# Altium PCB Cougar Power_Altium.PcbDoc
Units mil, origin at the board's own origin, x right, y up, seen from the top; angles counter-clockwise.
Board outline 8110 x 6100 mil, 2 copper layers (Top Layer, Bottom Layer); 48 components, 13 nets, 126 pads, 15 vias.
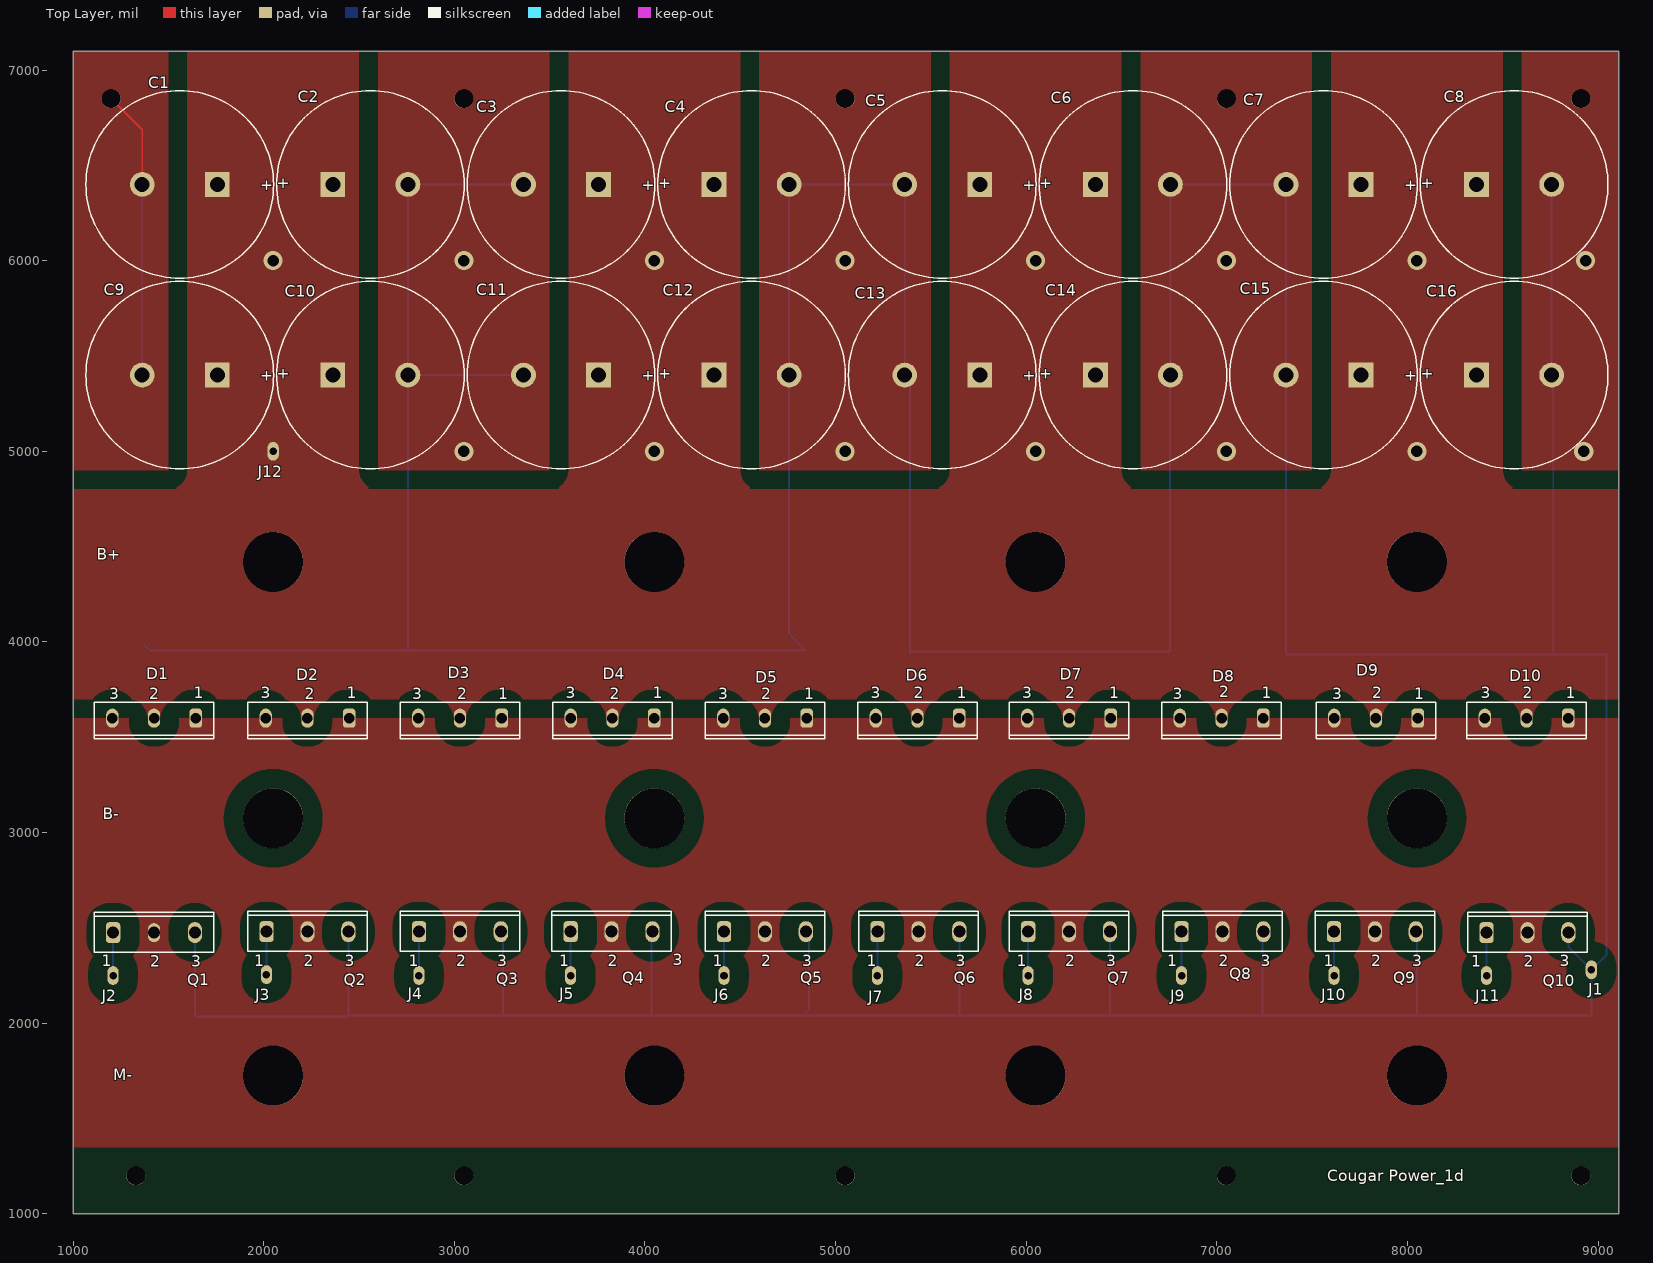
[diagram p0: Top Layer view]
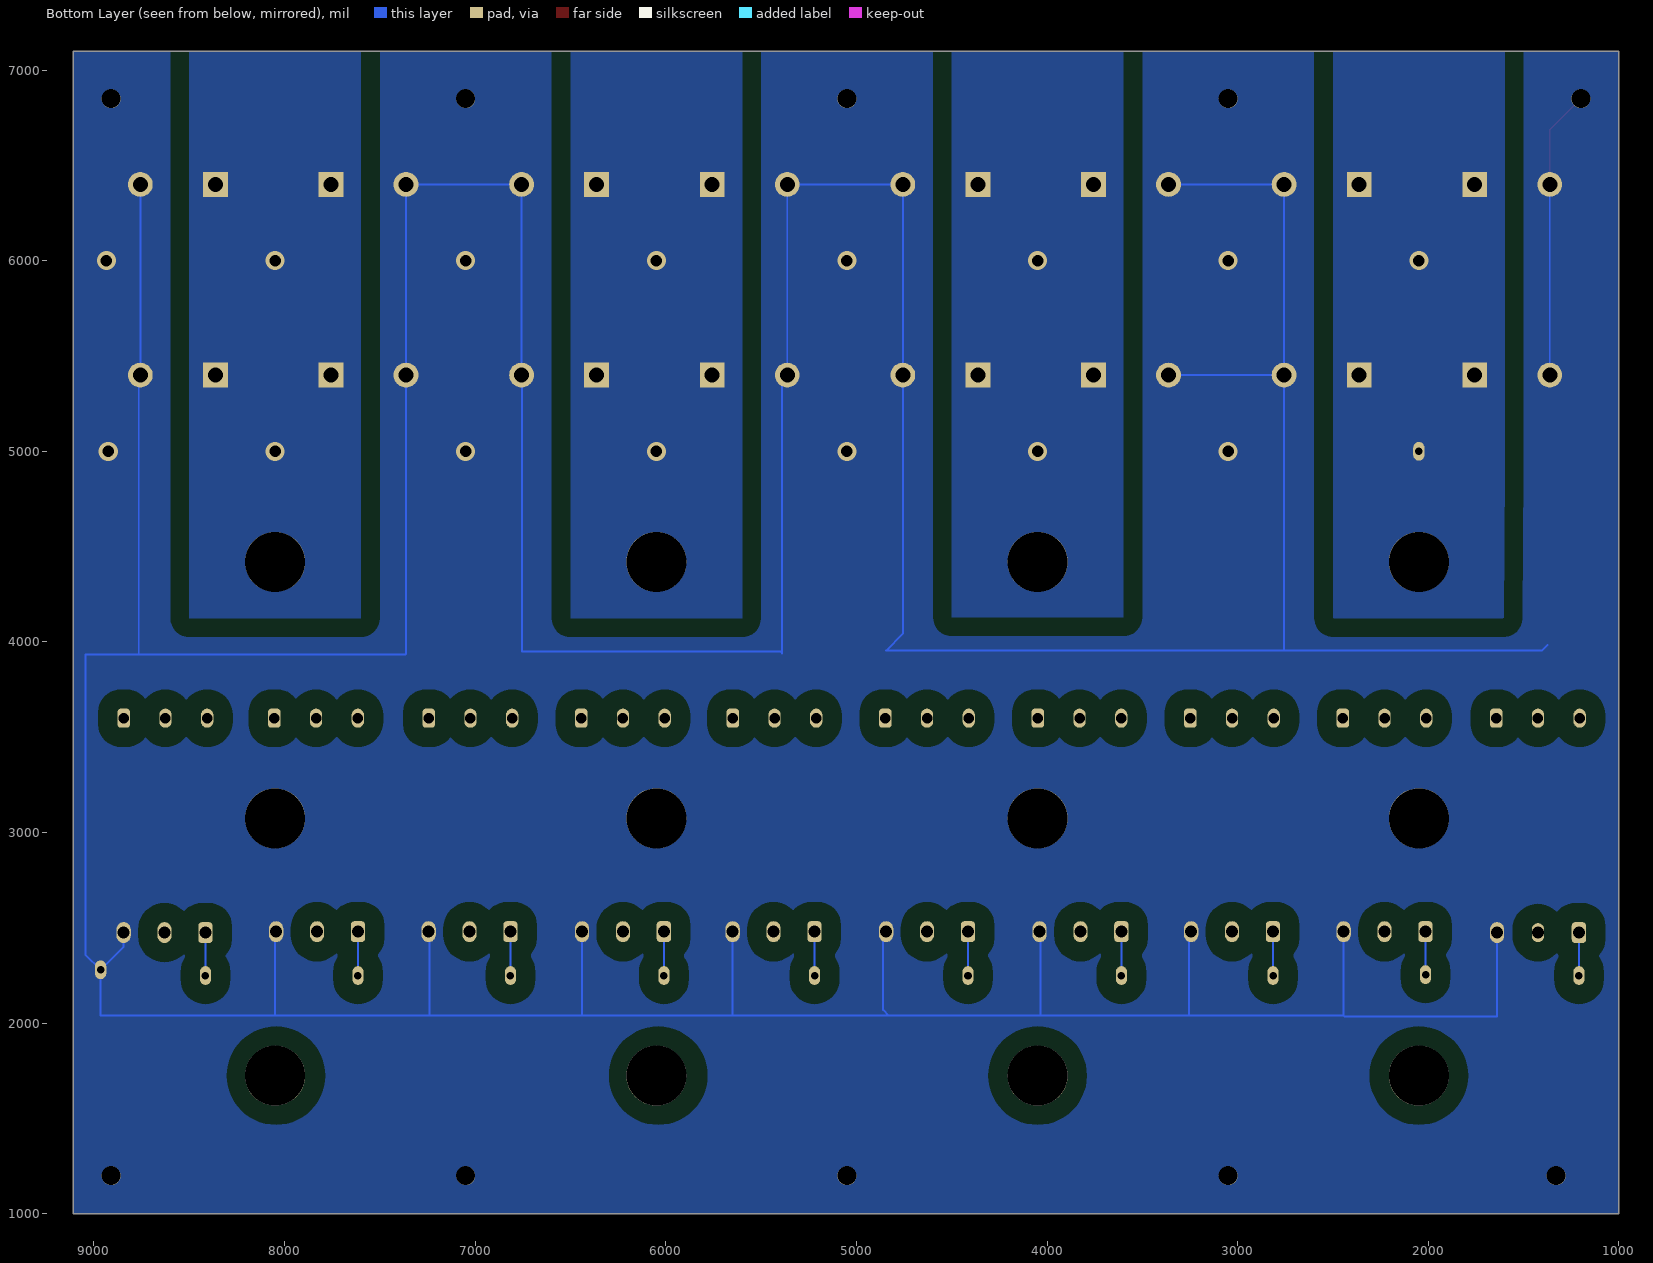
[diagram p1: Bottom Layer view, seen from below]

## Layer stack, top to bottom
Top Layer: signal copper 1.4
Dielectric: core 12.6, FR-4, Dk 4.8
Bottom Layer: signal copper 1.4

## Board outline
1000,1000 9110,1000 9110,7100 1000,7100

## Design rules (kind name [scope] priority, off if disabled: settings)
Clearance GND [InNet('GND')] p1: gap=95
Clearance [All] p2: gap=95
ComponentClearance [All] p1: gap=10 collisioncheckmode=3 verticalgap=10
Height [All] p1: minheight=0 maxheight=1655 prefheight=500
HoleSize [All] p1: absolutevalues=TRUE maxlimit=325 minlimit=1 maxpercent=80.000 minpercent=20.000
PolygonConnect [All] p1: connectstyle=Direct reliefconductorwidth=10 reliefentries=4 polygonreliefangle="90 Angle"
RoomDefinition "Cougar Power_1d" [InComponentClass('Cougar Power_1d')] p1: confinementstyle=ConfineIn formatcopy=TRUE lockcomponents=FALSE outline 9110,7100 1000,7100 1000,1000 9110,1000
RoutingVias [All] p1: holewidth=28 width=50 viastyle="Through Hole" minholewidth=28 minwidth=50 maxholewidth=28 maxwidth=50
SolderMaskExpansion [All] p1: expansion=4
TestPointUsage [All] p1: valid=0 allowmultiple=FALSE
Testpoint [All] p1: side=15 testpointundercomponent=TRUE minsize=40 maxsize=100 preferedsize=60 minholesize=0 maxholesize=40 preferedholesize=32 testpointgrid=1 style=1023 order=0123456789
Width [All] p1: maxlimit=10 minlimit=10 preferedwidth=10
16 further rules are at their usual default settings.

## Components (designator, comment, footprint, x,y, rotation, side; value= is the part's Value field where it differs from the comment)
C1 "820uF" CAPPRS10-25x40 1560,6400 r180 top
C2 "820uF" CAPPRS10-25x40 2560,6400 r0 top
C3 "820uF" CAPPRS10-25x40 3560,6400 r180 top
C4 "820uF" CAPPRS10-25x40 4560,6400 r0 top
C5 "820uF" CAPPRS10-25x40 5560,6400 r180 top
C6 "820uF" CAPPRS10-25x40 7560,5400 r180 top
C7 "820uF" CAPPRS10-25x40 6560,5400 r0 top
C8 "820uF" CAPPRS10-25x40 8560,6400 r0 top
C9 "820uF" CAPPRS10-25x40 6560,6400 r0 top
C10 "820uF" CAPPRS10-25x40 7560,6400 r180 top
C11 "820uF" CAPPRS10-25x40 5560,5400 r180 top
C12 "820uF" CAPPRS10-25x40 1560,5400 r180 top
C13 "820uF" CAPPRS10-25x40 2560,5400 r0 top
C14 "820uF" CAPPRS10-25x40 3560,5400 r180 top
C15 "820uF" CAPPRS10-25x40 4560,5400 r0 top
C16 "820uF" CAPPRS10-25x40 8560,5400 r0 top
D1 "STTH6002C" TO-247 1425,3600 r180 top
D2 "STTH6002C" TO-247 2230,3600 r180 top
D3 "STTH6002C" TO-247 3030,3600 r180 top
D4 "STTH6002C" TO-247 3830,3600 r180 top
D5 "STTH6002C" TO-247 4630,3600 r180 top
D6 "STTH6002C" TO-247 5430,3600 r180 top
D7 "STTH6002C" TO-247 6224.98,3600 r180 top
D8 "STTH6002C" TO-247 7025,3600 r180 top
D9 "STTH6002C" TO-247 7835,3600 r180 top
D10 "STTH6002C" TO-247 8625,3600 r180 top
J1 "SIN-002T-1.0" SIN-002T-1.0 8965,2280 r0 top
J2 "SIN-002T-1.0" SIN-002T-1.0 1210,2250 r0 top
J3 "SIN-002T-1.0" SIN-002T-1.0 2015,2255 r0 top
J4 "SIN-002T-1.0" SIN-002T-1.0 2815,2250 r0 top
J5 "SIN-002T-1.0" SIN-002T-1.0 3610,2250 r0 top
J6 "SIN-002T-1.0" SIN-002T-1.0 4415,2250 r0 top
J7 "SIN-002T-1.0" SIN-002T-1.0 5220,2250 r0 top
J8 "SIN-002T-1.0" SIN-002T-1.0 6010,2250 r0 top
J9 "SIN-002T-1.0" SIN-002T-1.0 6815,2250 r0 top
J10 "SIN-002T-1.0" SIN-002T-1.0 7615,2250 r0 top
J11 "SIN-002T-1.0" SIN-002T-1.0 8415,2250 r0 top
J12 "SIN-002T-1.0" SIN-002T-1.0 2050,5000 r0 top
Q1 "IRFP4668" TO-247AC#1 1425,2475 r0 top
Q2 "IRFP4668" TO-247AC#2 2230,2480 r0 top
Q3 "IRFP4668" TO-247AC#2 3030,2480 r0 top
Q4 "IRFP4668" TO-247AC#2 3825,2480 r0 top
Q5 "IRFP4668" TO-247AC#2 4630,2480 r0 top
Q6 "IRFP4668" TO-247AC#2 5435,2480 r0 top
Q7 "IRFP4668" TO-247AC#2 6225,2480 r0 top
Q8 "IRFP4668" TO-247AC#2 7030,2480 r0 top
Q9 "IRFP4668" TO-247AC#2 7830,2480 r0 top
Q10 "IRFP4668" TO-247AC#2 8630,2475 r0 top

## Footprints (in the part's own frame and the unit in brackets; to place one, negate y for a bottom-side part, rotate by r counter-clockwise, add the part's x,y. Pads: shape width x height; smd on the part's side, far side on the other; paste and mask are expansions set on the pad)
CAPPRS10-25x40 [mm] "Capacitor, Electrolytic, Radial, Snap-In Pins; Body 25 x 40 mm (Dia.xH typ); Pin Spacing 10 mm (typ)"
  rect 3.3x3.3 hole 2: 1(-5,0)
  round 3.3 hole 2: 2(5,0)
  silkscreen extent -12.5,-12.5 12.5,12.5
SIN-002T-1.0 [mm] "CONN TERM CRIMP 26-28AWG TIN"
  oval 1.5x2.5 hole 1: 1(0,0)
TO-247 [mm] "SIP with Mounting Hole; 3 Leads; Body 20.6 x 15.6 x 4.7 mm (typ); Pitch 5.56 mm"
  rrect50% 1.651x2.54 hole 1.4: 1(-5.56,0)
  oval 1.651x2.54 hole 1.4: 2(0,0) 3(5.56,0)
  silkscreen extent -7.95,-2.15 7.95,2.75
TO-247AC#1 [mm] "SIP with Mounting Hole; 3 Leads; Body 20 x 15.6 x 5 mm (typ); Pitch 5.45 mm"
  rrect50% 1.905x2.794 hole 1.6: 1(-5.45,0)
  oval 1.651x2.54 hole 1.6: 2(0,0)
  oval 1.905x2.794 hole 1.6: 3(5.45,0)
  silkscreen extent -7.95,-2.6 7.95,2.7
TO-247AC#2 [mm] "SIP with Mounting Hole; 3 Leads; Body 20 x 15.6 x 5 mm (typ); Pitch 5.45 mm"
  rrect50% 1.905x2.794 hole 1.6: 1(-5.45,0)
  oval 1.905x2.794 hole 1.6: 2(0,0) 3(5.45,0)
  silkscreen extent -7.95,-2.6 7.95,2.7

## Part data
D1 D2 D3 D4 D5 D6 D7 D8 D9 D10: library part STTH2002C
Q1 Q2 Q3 Q4 Q5 Q6 Q7 Q8 Q9 Q10: library part IRFP448

## Free pads (board coordinates)
  round 315 hole 315: 5(2050,1725) 5(2050,3075) 5(2050,4420) 5(4050,1725) 5(4050,3075) 5(4050,4420) 5(6050,1725) 5(6050,3075) 5(6050,4420) 5(8050,1725) 5(8050,3075) 5(8050,4420)
  round 100 hole 100: 11(1200,6850) 11(1330,1200) 11(3050,1200) 11(3050,6850) 11(5050,1200) 11(5050,6850) 11(7050,1200) 11(7050,6850) 11(8910,1200) 11(8910,6850)

## Via types
v1: diameter 100, hole 60, Top Layer to Bottom Layer, 15 vias

## Nets (pads, with @x,y where several pads share a name; then routed paths per layer and width w, separated by ;. In a path a pad name is that pad's centre, name@x,y a point inside that pad or via, vN(x,y) a via of type N, cw(c..) or ccw(c..) an arc to the next point about the centre after c; other vN are vias at no path point)
+VBATT: C1.1 C2.1 C3.1 C4.1 C5.1 C6.1 C7.1 C8.1 C9.1 C10.1 C11.1 C12.1 C13.1 C14.1 C15.1 C16.1 D1.2 D2.2 D3.2 D4.2 D5.2 D6.2 D7.2 D8.2 D9.2 D10.2 J12.1 pad.5@2050,4420 pad.5@4050,4420 pad.5@6050,4420 pad.5@8050,4420
  other v1: 4050,5000 6050,5000 8050,5000 2050,6000 4050,6000 6050,6000 8050,6000
GND: C1.2 C2.2 C3.2 C4.2 C5.2 C6.2 C7.2 C8.2 C9.2 C10.2 C11.2 C12.2 C13.2 C14.2 C15.2 C16.2 J1.1 pad.5@2050,3075 pad.5@4050,3075 pad.5@6050,3075 pad.5@8050,3075 pad.11 Q1.3 Q2.3 Q3.3 Q4.3 Q5.3 Q6.3 Q7.3 Q8.3 Q9.3 Q10.3 | length 38770.8
  Top Layer w10: pad.11@1200,6850 1363.15,6686.85 C1.2
  Bottom Layer w10: C1.2 C12.2 C12.2@1375,5388.15 ; 1375,3985 1405,3955 4845,3955 4756.85,4043.15 C15.2 C4.2 C5.2 C11.2 5390,5373.15 5390,3940 5400,3950 6755,3950 6755,5398.15 C7.2 C9.2 C10.2 C6.2 7363.15,3936.85 7365,3935 9045,3935 9045,2360 J1.1 ; Q1.3 1639.57,2035.43 2440.43,2035.43 2444.57,2039.57 ; Q2.3 2444.57,2039.57 ; C13.2 C14.2 ; 2765,3955 2756.85,3963.15 C2.2 C3.2 ; Q3.3 3255,2469.57 3255,2040 3254.57,2039.57 ; 4034.57,2039.57 4035,2040 4035,2475.43 Q4.3 ; 4829.57,2039.57 4860,2070 4860,2464.57 Q5.3 ; 5649.57,2039.57 Q6.3 ; 6439.57,2039.57 6440,2040 6440,2479.57 Q7.3 ; 7239.57,2039.57 7240,2040 7240,2475.43 Q8.3 ; Q9.3 8050,2474.57 8050,2040 8049.57,2039.57 ; C8.2 C16.2 8765,5391.85 8765,3935 ; Q10.3 8844.57,2400.43 J1.1 ; 2444.57,2039.57 8964.57,2039.57 8965,2040 J1.1
  other v1: 3050,5000 5050,5000 7050,5000 8925,5000 3050,6000 5050,6000 7050,6000 8935,6000
M-: D1.1 D1.3 D2.1 D2.3 D3.1 D3.3 D4.1 D4.3 D5.1 D5.3 D6.1 D6.3 D7.1 D7.3 D8.1 D8.3 D9.1 D9.3 D10.1 D10.3 pad.5@2050,1725 pad.5@4050,1725 pad.5@6050,1725 pad.5@8050,1725 Q1.2 Q2.2 Q3.2 Q4.2 Q5.2 Q6.2 Q7.2 Q8.2 Q9.2 Q10.2
NetJ2_1: J2.1 Q1.1 | length 224.6
  Bottom Layer w10: J2.1@1210.43,2250.43 Q1.1
NetJ3_1: J3.1 Q2.1 | length 224.6
  Bottom Layer w10: J3.1 Q2.1@2015,2479.57
NetJ4_1: J4.1 Q3.1 | length 229.6
  Bottom Layer w10: J4.1@2815.43,2250.43 Q3.1
NetJ5_1: J5.1 Q4.1 | length 229.6
  Bottom Layer w10: J5.1 Q4.1@3610,2479.57
NetJ6_1: J6.1 Q5.1 | length 229.6
  Bottom Layer w10: J6.1@4415.43,2250.43 Q5.1
NetJ7_1: J7.1 Q6.1 | length 229.6
  Bottom Layer w10: J7.1 Q6.1@5220,2479.57
NetJ8_1: J8.1 Q7.1 | length 229.6
  Bottom Layer w10: J8.1@6010.43,2250.43 Q7.1
NetJ9_1: J9.1 Q8.1 | length 229.6
  Bottom Layer w10: J9.1 Q8.1@6815,2479.57
NetJ10_1: J10.1 Q9.1 | length 229.6
  Bottom Layer w10: J10.1@7615.43,2250.43 Q9.1
NetJ11_1: J11.1 Q10.1 | length 224.6
  Bottom Layer w10: J11.1@8415.43,2250.43 Q10.1

## Polygon pours and split planes (outlines as drawn)
M- on Top Layer "Top Layer-M- 1" (solid, pour order 1007): 1227.83,1350 1432.17,1350 1432.17,1410 1225,1410
M- on Top Layer "Top Layer-M-" (solid, pour order 1006): 1000,1350 9110,1350 9110,3600 1000,3600
GND on Top Layer "Top Layer-GND" (solid, pour order 1000): 8555,7100 9110,7100 9110,4850 8545,4850 8545,7100
GND on Top Layer "Top Layer-GND 1" (solid, pour order 1001): 6550,7100 7555,7100 7555,4840 6550,4840
GND on Top Layer "Top Layer-GND 2" (solid, pour order 1002): 4550,7100 5550,7100 5550,4840 4550,4840
GND on Top Layer "Top Layer-GND 3" (solid, pour order 1003): 2550,7100 3550,7100 3550,4865 2550,4865
GND on Top Layer "Top Layer-GND 4" (solid, pour order 1004): 1000,7100 1550,7100 1550,4830 1000,4830
+VBATT on Top Layer "Top Layer-+VBATT" (solid, pour order 1005): 7550,7100 8550,7100 8550,4800 7550,4800
+VBATT on Top Layer "Top Layer-+VBATT 1" (solid, pour order 1006): 6550,7100 6550,4745 5545,4745 5545,7100
+VBATT on Top Layer "Top Layer-+VBATT 2" (solid, pour order 1007): 4550,7100 4550,4800 3550,4800 3550,7100
+VBATT on Top Layer "Top Layer-+VBATT 3" (solid, pour order 1008): 2550,7100 2550,4800 1545,4800 1545,7100
+VBATT on Top Layer "Top Layer-+VBATT 4" (solid, pour order 1009): 1000,4800 9110,4800 9110,3600 1006.33,3600 1006.33,4800
GND on Bottom Layer "Bottom Layer-GND" (solid, pour order 1009): 1000,7100 1000,1000 9115,1000 9115,7100
+VBATT on Bottom Layer "Bottom Layer-+VBATT" (solid, pour order 1010): 1550,7100 2550,7100 2550,4080 1550,4080
+VBATT on Bottom Layer "Bottom Layer-+VBATT 1" (solid, pour order 1011): 3550,7100 4560,7100 4560,4075 3550,4075
+VBATT on Bottom Layer "Bottom Layer-+VBATT 2" (solid, pour order 1012): 5550,7100 6555,7100 6555,4075 5550,4075
+VBATT on Bottom Layer "Bottom Layer-+VBATT 3" (solid, pour order 1013): 7550,7100 8545,7100 8545,4080 7550,4080
GND on Bottom Solder (solid): 1000,2700 9110,2700 9110,3450 1000,3450

## Silkscreen, mask and mechanical layers (free items; w line width, h text height)
Top Overlay:
  text "B+" at 1125,4430 h60
  text "B-" at 1155,3070 h60
  text "M-" at 1210,1700 h60
  text "Cougar Power_1d" at 7580,1170 h60
Top Solder:
  region: 1000,4800 1000,4050 9110,4050 9110,4800
  region: 1000,1350 9110,1350 9110,2100 1000,2100
  lines w80: 1040,2100 1040,2585
  lines w90: 1825,2100 1825,2580 ; 2630,2095 2630,2600 ; 3425,2100 3425,2595 ; 4225,2100 4225,2590 ; 5030,2100 5030,2595 ; 5825,2100 5825,2595 ; 6625,2105 6625,2590 ; 7425,2095 7425,2590 ; 8230,2100 8230,2595
  lines w150: 1425,2300 1425,2595 ; 2230,2300 2230,2600 ; 3030,2295 3030,2590 ; 3825,2300 3825,2600 ; 4630,2300 4630,2595 ; 5435,2295 5435,2595 ; 6225,2300 6225,2600 ; 7030,2300 7030,2600 ; 7830,2300 7830,2600 ; 8630,2300 8630,2595
Bottom Solder:
  region: 1600,4725 1600,4125 2500,4125 2500,4725
  region: 3600,4125 3600,4725 4500,4725 4500,4125
  region: 5600,4725 5600,4125 6500,4125 6500,4725
  region: 7600,4725 7600,4125 8500,4125 8500,4725
  lines w70: 1040,3450 1040,3700
  lines w90: 8230,3450 8230,3700
  lines w95: 1830,3450 1830,3700 ; 2630,3455 2630,3700 ; 3430,3450 3430,3700 ; 4230,3450 4230,3700 ; 5030,3455 5030,3700 ; 5830,3455 5830,3700 ; 6625,3455 6625,3700 ; 7430,3450 7430,3700
  lines w120: 9040,3460 9040,3700
Mechanical 1:
  the board outline again, w5

## Text inside footprints (layer, text, board x,y; h text height)
C1: Top Overlay "+" at 2137.76,6429.53 h59.05 r180
C2: Top Overlay "+" at 1982.24,6370.47 h59.05
C3: Top Overlay "+" at 4137.76,6429.53 h59.05 r180
C4: Top Overlay "+" at 3982.24,6370.47 h59.05
C5: Top Overlay "+" at 6137.76,6429.53 h59.05 r180
C6: Top Overlay "+" at 8137.76,5429.53 h59.05 r180
C7: Top Overlay "+" at 5982.24,5370.47 h59.05
C8: Top Overlay "+" at 7982.24,6370.47 h59.05
C9: Top Overlay "+" at 5982.24,6370.47 h59.05
C10: Top Overlay "+" at 8137.76,6429.53 h59.05 r180
C11: Top Overlay "+" at 6137.76,5429.53 h59.05 r180
C12: Top Overlay "+" at 2137.76,5429.53 h59.05 r180
C13: Top Overlay "+" at 1982.24,5370.47 h59.05
C14: Top Overlay "+" at 4137.76,5429.53 h59.05 r180
C15: Top Overlay "+" at 3982.24,5370.47 h59.05
C16: Top Overlay "+" at 7982.24,5370.47 h59.05
D1: Top Overlay "1" at 1634.09,3704.09 h59.06; Top Overlay "2" at 1400,3700 h59.06; Top Overlay "3" at 1189.09,3699.09 h59.06
D2: Top Overlay "3" at 1985,3705 h59.06; Top Overlay "2" at 2215,3700 h59.06; Top Overlay "1" at 2435,3705 h59.06
D3: Top Overlay "1" at 3230,3700 h59.06; Top Overlay "2" at 3015,3700 h59.06; Top Overlay "3" at 2779.09,3699.09 h59.06
D4: Top Overlay "1" at 4040,3705 h59.06; Top Overlay "2" at 3815,3700 h59.06; Top Overlay "3" at 3585,3705 h59.06
D5: Top Overlay "1" at 4835,3700 h59.06; Top Overlay "2" at 4610,3700 h59.06; Top Overlay "3" at 4384.09,3699.09 h59.06
D6: Top Overlay "1" at 5635,3705 h59.06; Top Overlay "2" at 5409.09,3704.09 h59.06; Top Overlay "3" at 5185,3705 h59.06
D7: Top Overlay "1" at 6435,3705 h59.06; Top Overlay "2" at 6205,3705 h59.06; Top Overlay "3" at 5980,3705 h59.06
D8: Top Overlay "1" at 7235,3705 h59.06; Top Overlay "2" at 7014.09,3709.09 h59.06; Top Overlay "3" at 6770,3700 h59.06
D9: Top Overlay "1" at 8035,3700 h59.06; Top Overlay "2" at 7815,3705 h59.06; Top Overlay "3" at 7605,3700 h59.06
D10: Top Overlay "1" at 8830,3705 h59.06; Top Overlay "2" at 8605,3705 h59.06; Top Overlay "3" at 8385,3705 h59.06
Q1: Top Overlay "1" at 1150,2300 h59.06; Top Overlay "2" at 1405,2294.88 h59.06; Top Overlay "3" at 1619.57,2294.88 h59.06
Q2: Top Overlay "1" at 1950,2300 h59.06; Top Overlay "2" at 2210,2299.88 h59.06; Top Overlay "3" at 2424.57,2299.88 h59.06
Q3: Top Overlay "1" at 2760,2300 h59.06; Top Overlay "2" at 3010,2299.88 h59.06; Top Overlay "3" at 3224.57,2299.88 h59.06
Q4: Top Overlay "1" at 3550,2300 h59.06; Top Overlay "2" at 3805,2299.88 h59.06; Top Overlay "3" at 4145,2305 h59.06
Q5: Top Overlay "1" at 4355,2300 h59.06; Top Overlay "2" at 4610,2299.88 h59.06; Top Overlay "3" at 4824.57,2299.88 h59.06
Q6: Top Overlay "1" at 5165,2300 h59.06; Top Overlay "2" at 5415,2299.88 h59.06; Top Overlay "3" at 5629.57,2299.88 h59.06
Q7: Top Overlay "1" at 5950,2300 h59.06; Top Overlay "2" at 6205,2299.88 h59.06; Top Overlay "3" at 6419.57,2299.88 h59.06
Q8: Top Overlay "1" at 6740,2300 h59.06; Top Overlay "2" at 7010,2299.88 h59.06; Top Overlay "3" at 7230,2300 h59.06
Q9: Top Overlay "1" at 7560,2300 h59.06; Top Overlay "2" at 7810,2299.88 h59.06; Top Overlay "3" at 8024.57,2299.88 h59.06
Q10: Top Overlay "1" at 8335,2295 h59.06; Top Overlay "2" at 8610,2294.88 h59.06; Top Overlay "3" at 8800,2300 h59.06